# Altium PCB main.PcbDoc (part 1 of 2)
Units mm, origin at the board's own origin, x right, y up, seen from the top; angles counter-clockwise.
Board outline 97 x 82.5 mm, 4 copper layers (Top Layer, +5/3.3, GND, Bottom Layer), stack 1.656 mm thick; 92 components, 74 nets, 382 pads, 341 vias.
Unrouted connection lines stored in the file: 1.
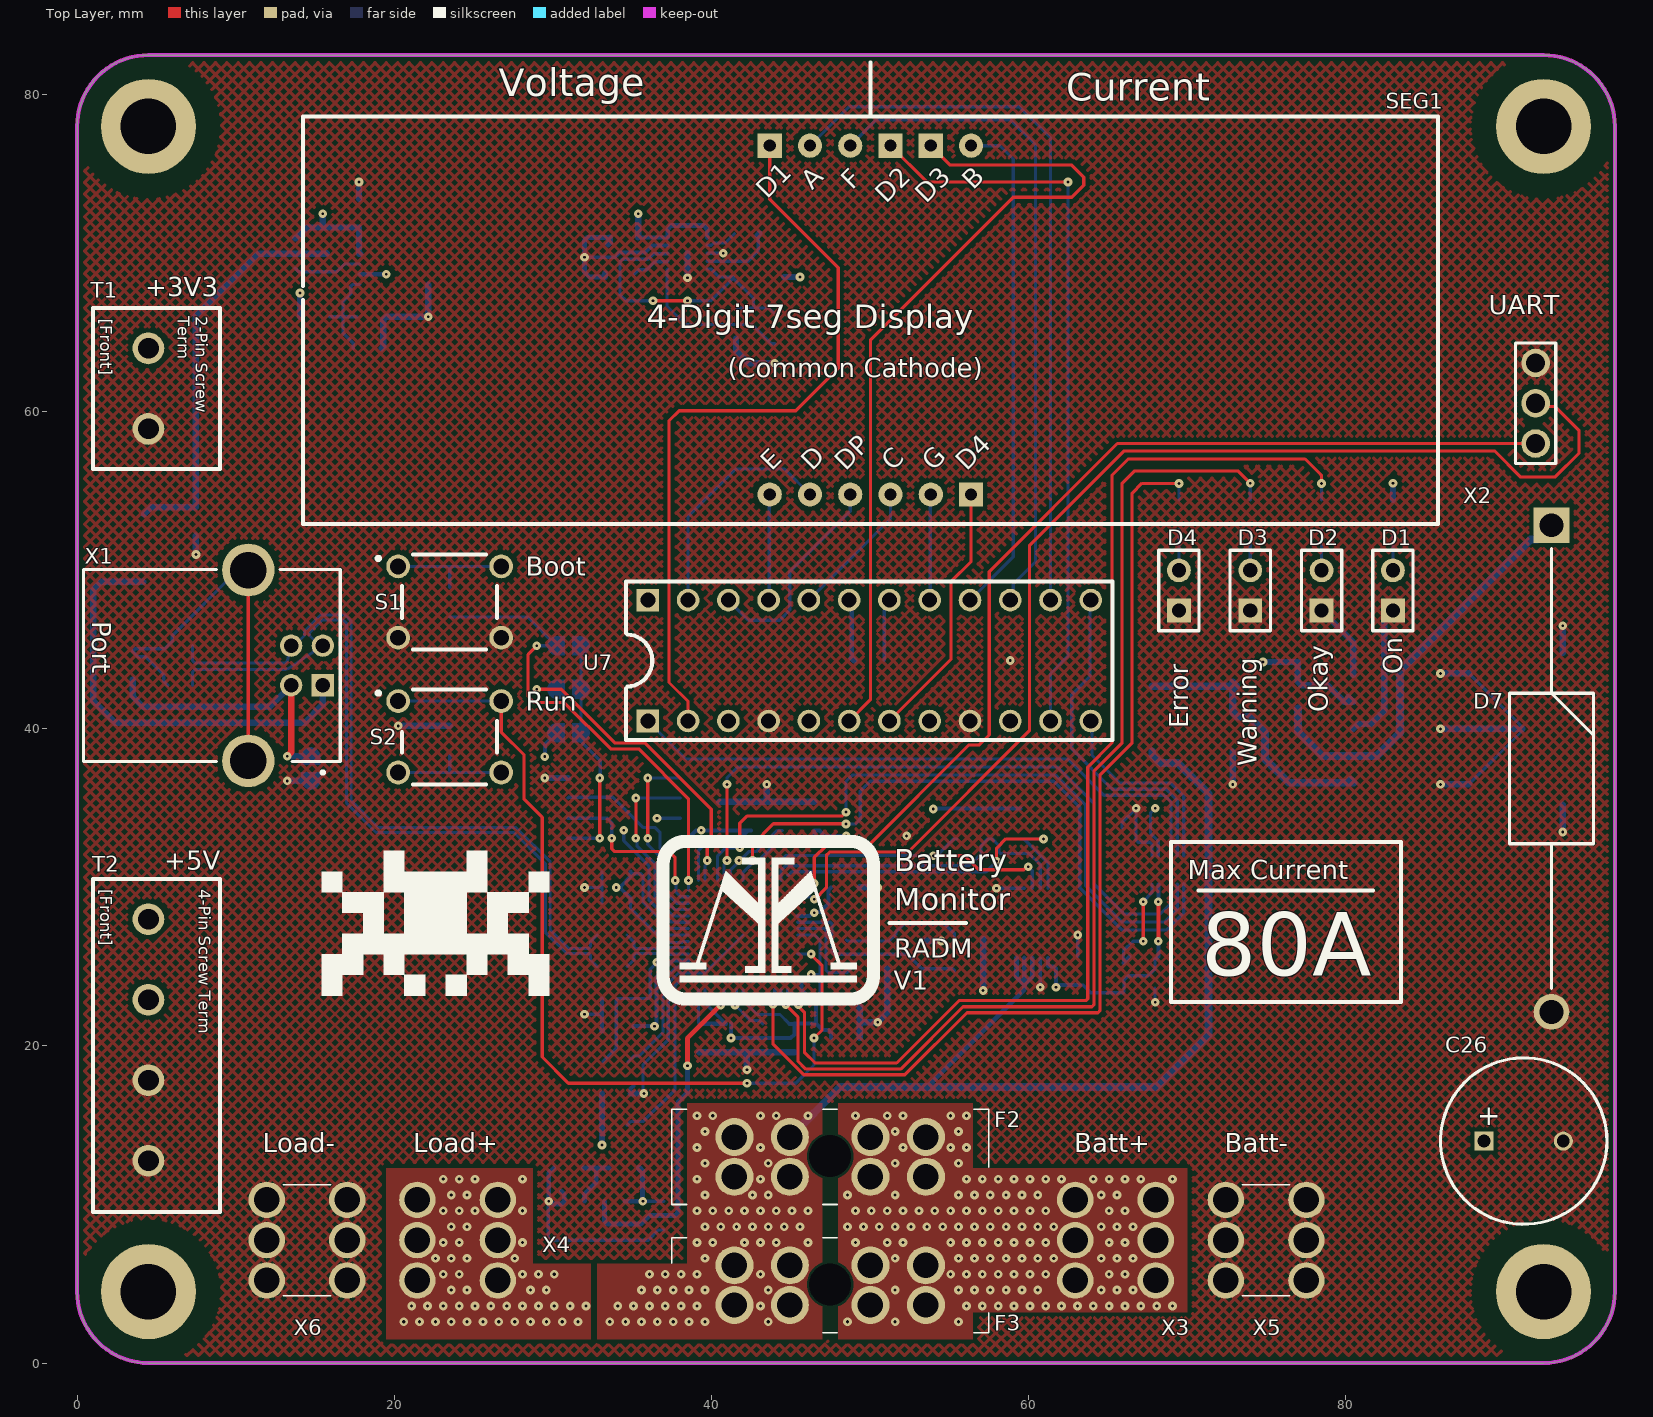
[diagram p0: Top Layer view]
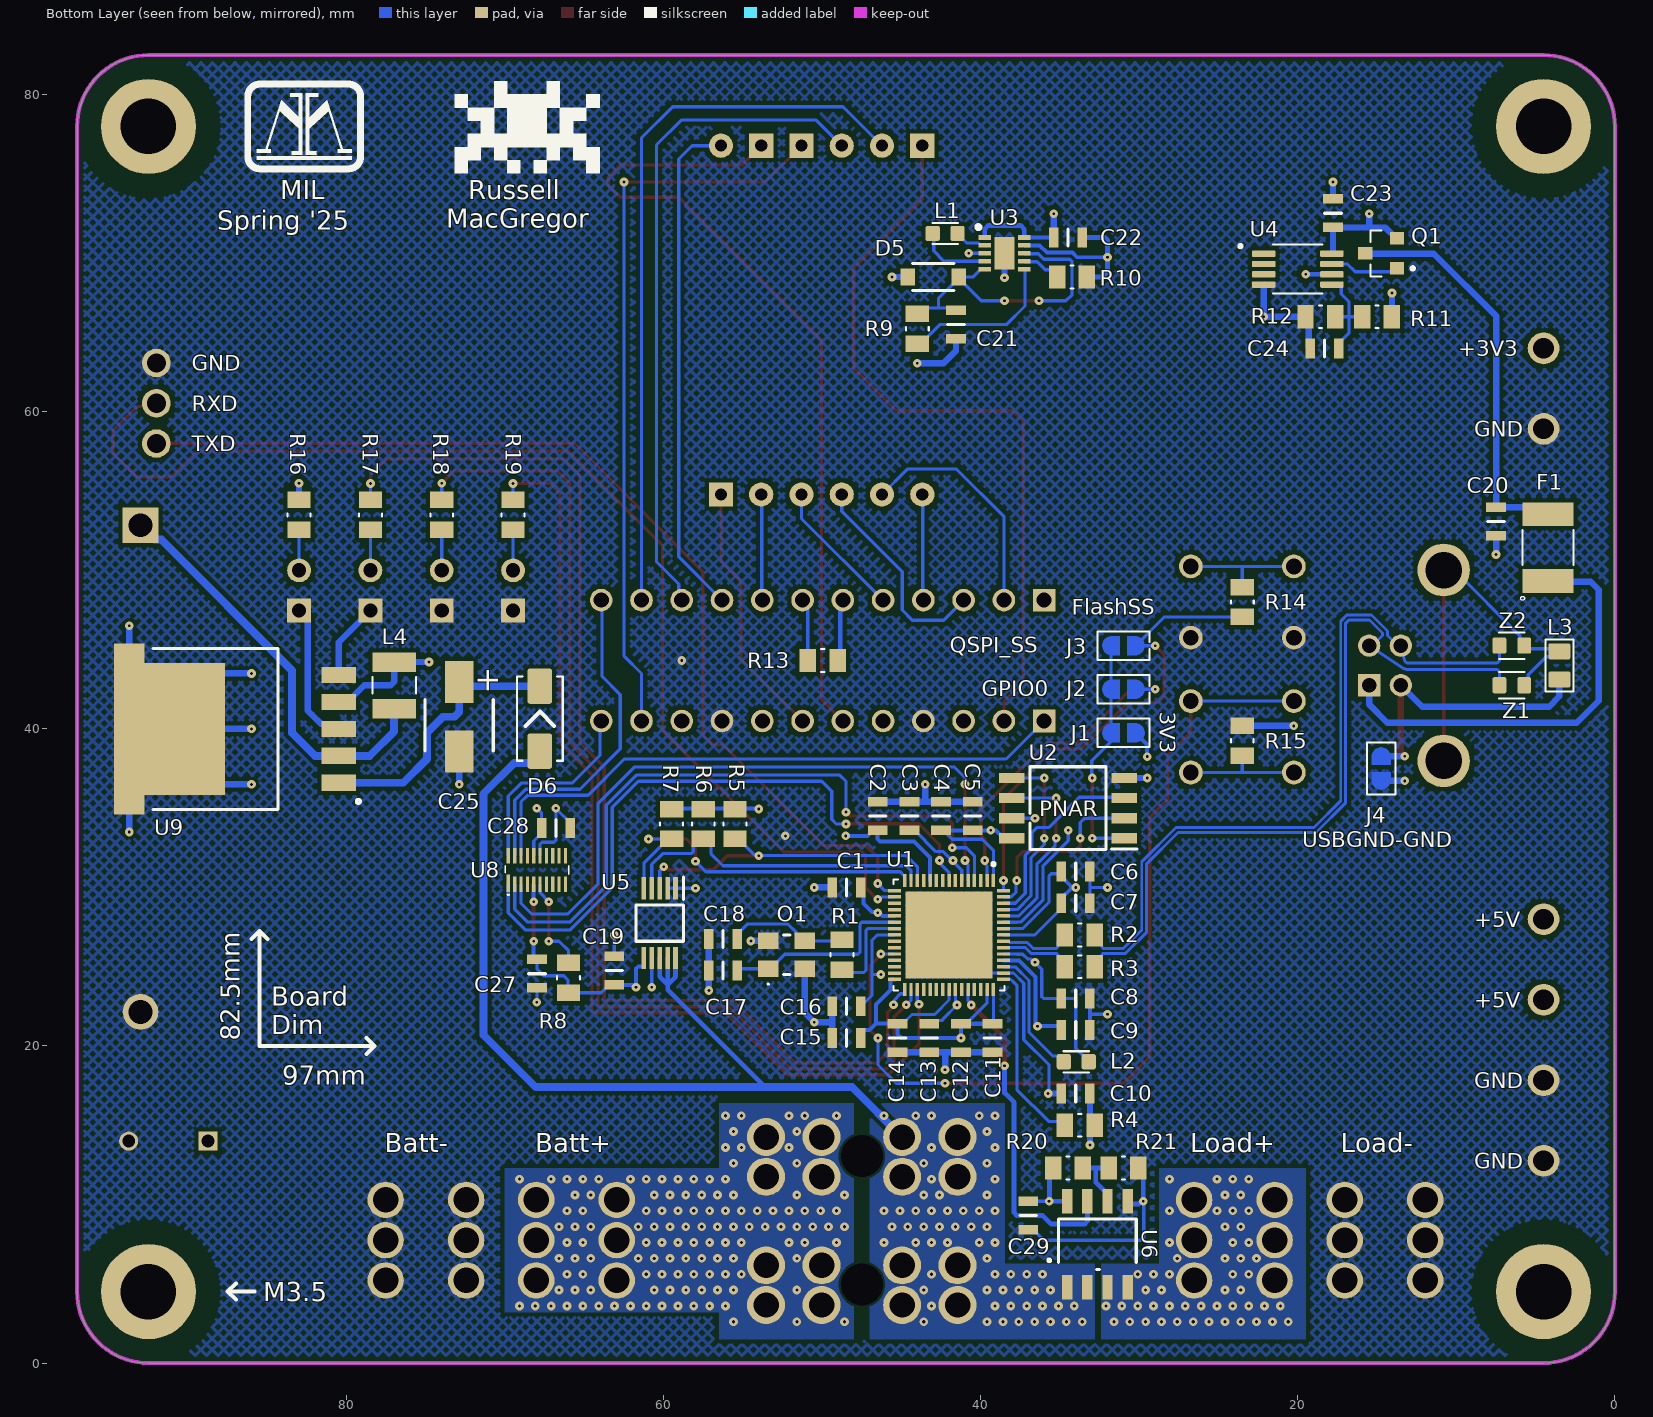
[diagram p1: Bottom Layer view, seen from below]
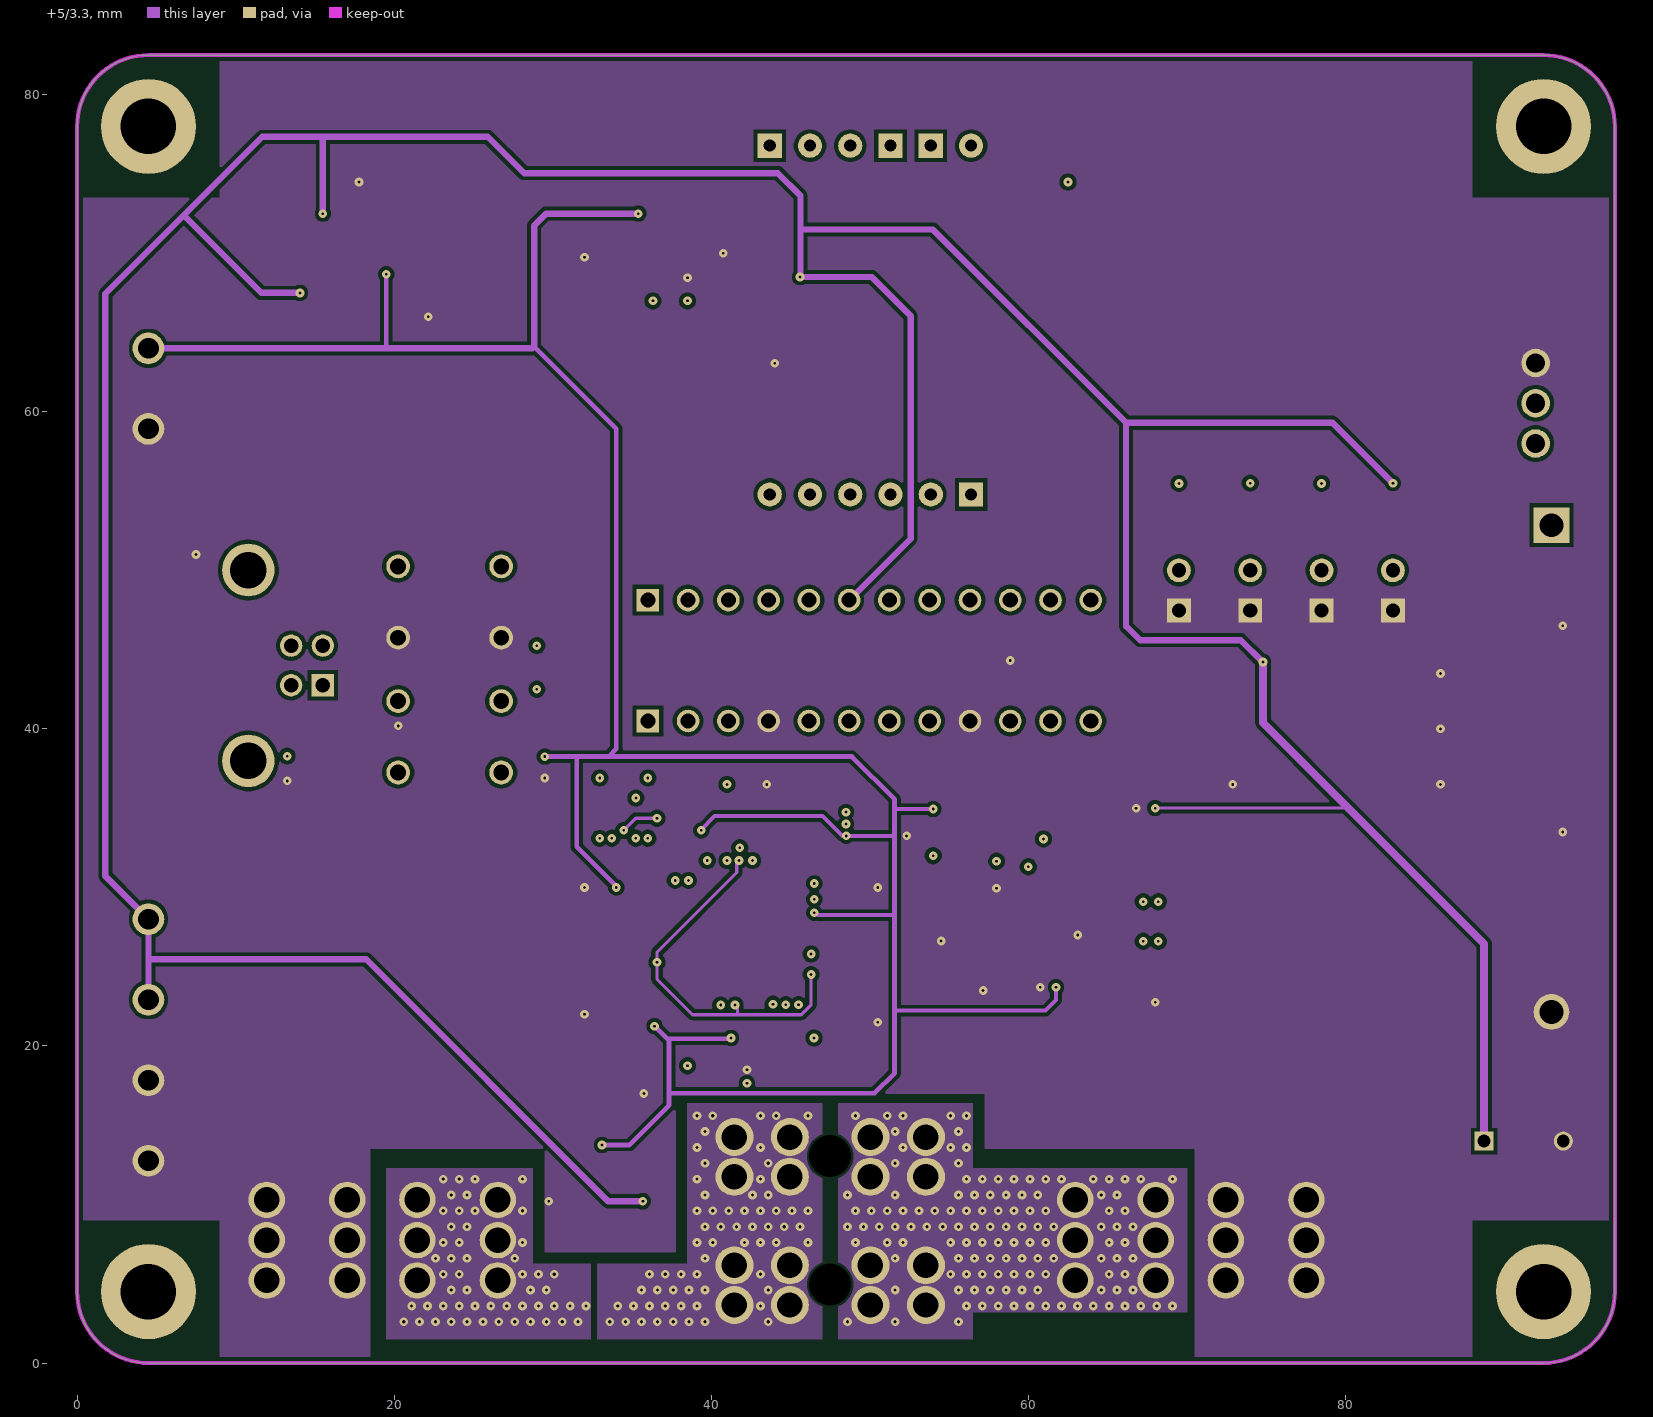
[diagram p2: +5/3.3]
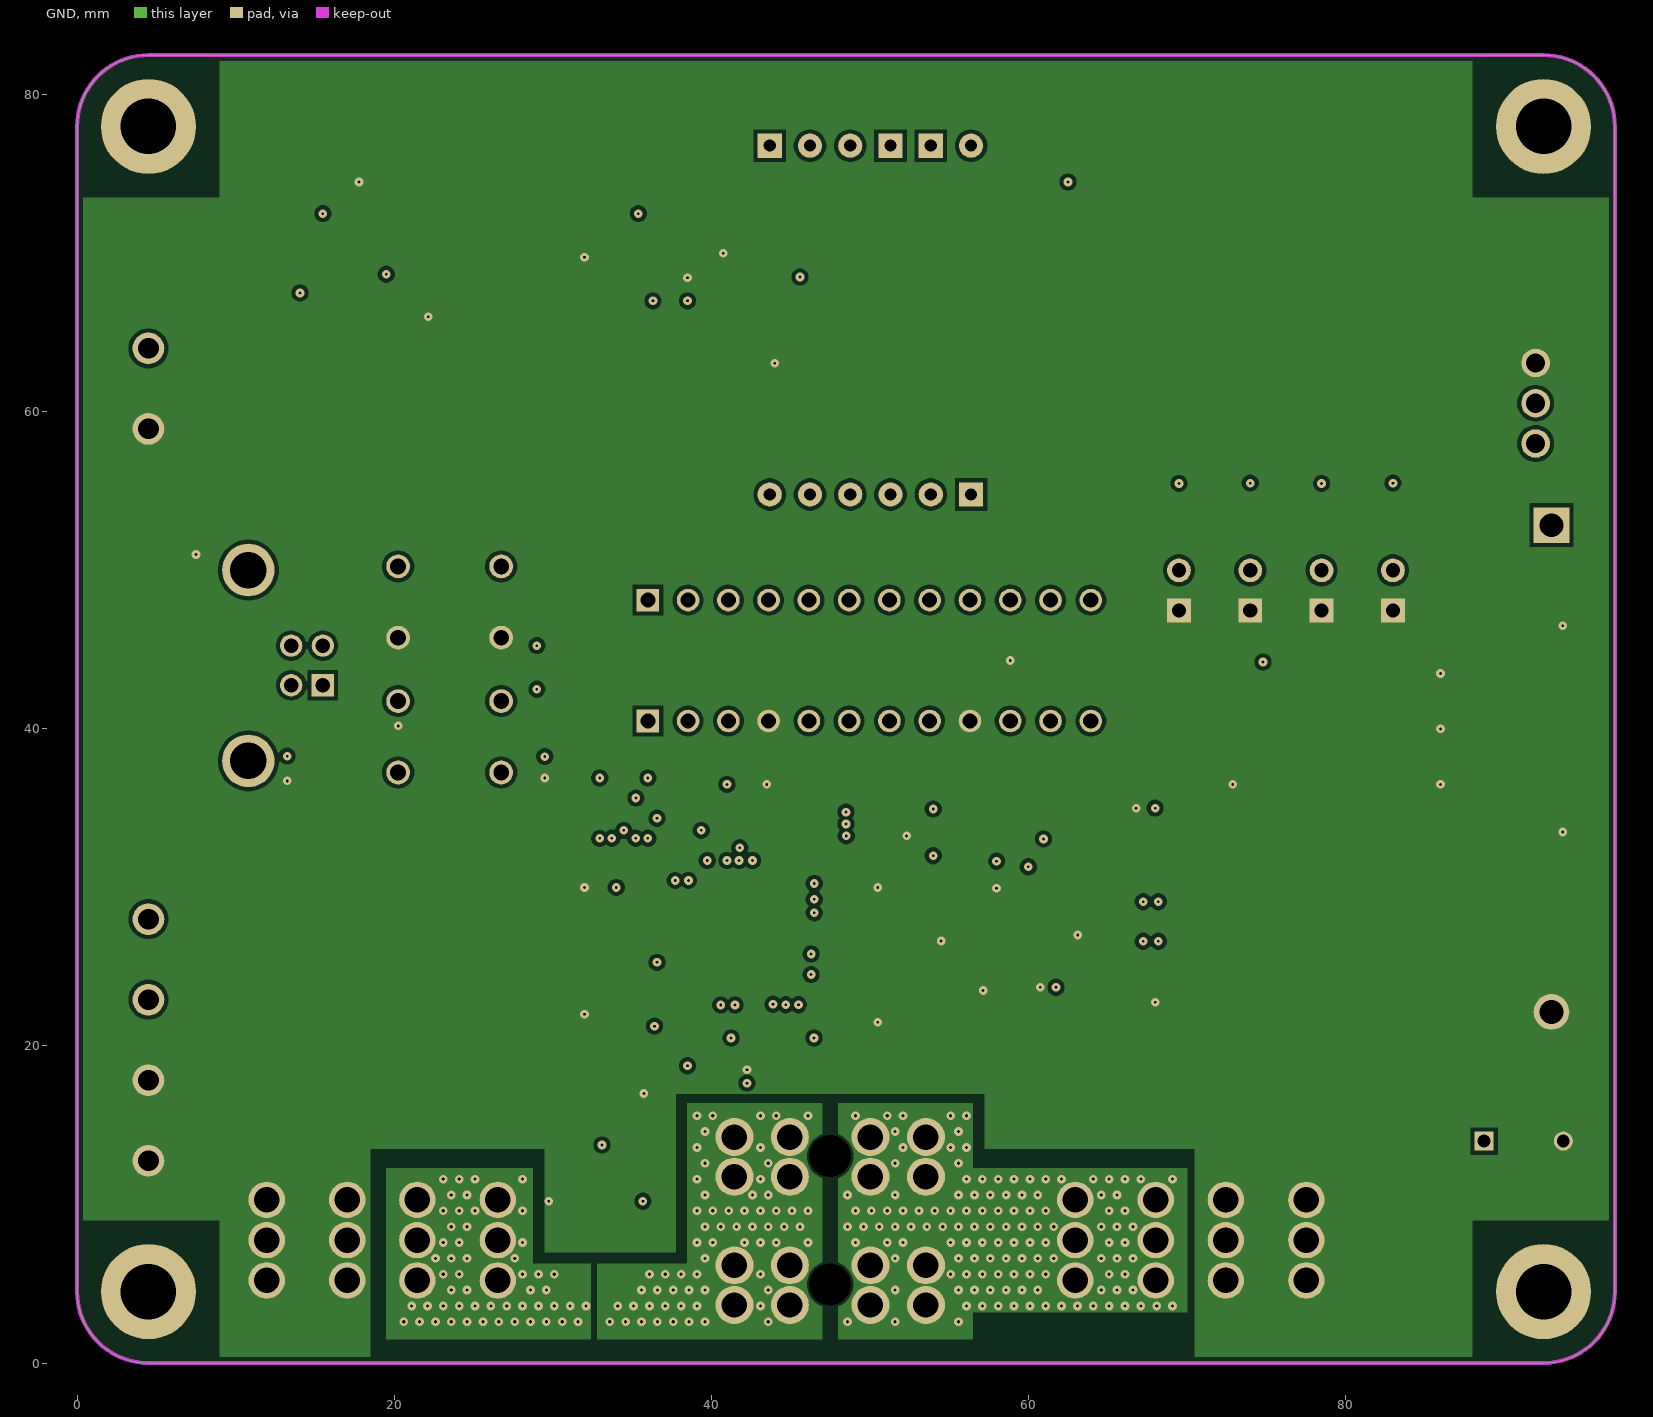
[diagram p3: GND]

## Layer stack, top to bottom
Top Solder: solder mask 0.0102, Solder Resist, Dk 3.8
Top Layer: signal copper 0.07
Dielectric: prepreg 0.2104, 7628*1, Dk 4.4
+5/3.3: signal copper 0.0152
Core: dielectric 1.065, FR-4, Dk 4.6
GND: signal copper 0.0152
Dielectric 3: prepreg 0.2104, 7628*1, Dk 4.4
Bottom Layer: signal copper 0.07
Bottom Solder: solder mask 0.0102, Solder Resist, Dk 3.8

## Board outline
4.5,0 cw(c4.5,4.5) 0,4.5 0,78 cw(c4.5,78) 4.5,82.5 92.5,82.5 cw(c92.5,78) 97,78 97,4.5 cw(c92.5,4.5) 92.5,0

## Design rules (kind name [scope] priority, off if disabled: settings)
BoardOutlineClearance [All] p1: gap=0.2 ignorepadtopadclearanceinfootprint=FALSE
Clearance "Different Nets" [All] p1: gap=0.1 ignorepadtopadclearanceinfootprint=TRUE except(0.15: Arc-Hole Track-Hole SMDPad-Hole THPad-Hole Via-Hole Fill-Hole Poly-Hole Region-Hole Text-Hole; 0.25: Arc-Fill Arc-Poly Arc-Region Track-Fill Track-Poly Track-Region SMDPad-Fill SMDPad-Poly SMDPad-Region THPad-Fill THPad-Poly THPad-Region Via-Fill Via-Poly Via-Region Fill-Fill Fill-Poly Fill-Region Poly-Poly Poly-Region Region-Region)
Clearance "Same Net" [All] p2: gap=0 ignorepadtopadclearanceinfootprint=FALSE except(0.1: THPad-Via)
Clearance "Diff Pairs" [All] p3: gap=0.15 ignorepadtopadclearanceinfootprint=TRUE
ComponentClearance [All] p1: gap=0.102 collisioncheckmode=3 verticalgap=0.102 showdistances=TRUE
DiffPairsRouting [All] p1: maxlimit=0.127 minlimit=0.127 mostfreqgap=0.127 toplayer_minwidth=0.185 toplayer_maxwidth=0.185 toplayer_prefwidth=0.185 midlayer1_minwidth=0.154 midlayer1_maxwidth=0.154 midlayer1_prefwidth=0.154 midlayer2_minwidth=0.154 midlayer2_maxwidth=0.154 midlayer2_prefwidth=0.154 bottomlayer_minwidth=0.185 bottomlayer_maxwidth=0.185 bottomlayer_prefwidth=0.185 impedanceprofiledriven=TRUE impedanceprofileid={A8D17695-7C71-43F6-A524-14699D1E17CB} impedanceprofilevalue=90.000000 maxuncoupledlength=12.7
Height [All] p1: minheight=0 maxheight=1816.048 prefheight=12.7
HoleSize [All] p1: absolutevalues=TRUE maxlimit=6.3 minlimit=0.15 maxpercent=80.000 minpercent=20.000
HoleToHoleClearance [All] p1: gap=0.25 allowstackedmicrovias=FALSE
MinimumAnnularRing [All] p1: minimumring=0.076
MinimumSolderMaskSliver [All] p1: minsoldermaskwidth=0
PlaneClearance [All] p1: clearance=0.4
PlaneConnect PlaneConnectPowerPads [InPadClass('PowerPads')] p1: planeconnectstyle=Direct reliefexpansion=0.508 reliefentries=4 reliefconductorwidth=0.254 reliefairgap=0.254
PlaneConnect PlaneConnectTopLayer [OnLayer('Top Layer')] p2: pad.planeconnectstyle=Relief pad.reliefexpansion=0.3 pad.reliefentries=4 pad.reliefconductorwidth=0.203 pad.reliefairgap=0.203 via.planeconnectstyle=Direct via.reliefexpansion=0.3 via.reliefentries=4 via.reliefconductorwidth=0.127 via.reliefairgap=0.127
PlaneConnect PlaneConnectBottomLayer [OnLayer('Bottom Layer')] p3: pad.planeconnectstyle=Relief pad.reliefexpansion=0.3 pad.reliefentries=4 pad.reliefconductorwidth=0.203 pad.reliefairgap=0.203 via.planeconnectstyle=Direct via.reliefexpansion=0.3 via.reliefentries=4 via.reliefconductorwidth=0.127 via.reliefairgap=0.127
PlaneConnect PlaneConnectMidLayer1 [OnLayer('Mid Layer 1')] p4: pad.planeconnectstyle=Relief pad.reliefexpansion=0.3 pad.reliefentries=4 pad.reliefconductorwidth=0.102 pad.reliefairgap=0.102 via.planeconnectstyle=Direct via.reliefexpansion=0.3 via.reliefentries=4 via.reliefconductorwidth=0.127 via.reliefairgap=0.127
PlaneConnect PlaneConnectMidLayer2 [OnLayer('Mid Layer 2')] p5: pad.planeconnectstyle=Relief pad.reliefexpansion=0.3 pad.reliefentries=4 pad.reliefconductorwidth=0.102 pad.reliefairgap=0.102 via.planeconnectstyle=Direct via.reliefexpansion=0.3 via.reliefentries=4 via.reliefconductorwidth=0.127 via.reliefairgap=0.127
PolygonConnect "High Current" [InNet('NetF2_2') OR InNet('Battery+') OR InNet('Load+') OR InNet('GND')] p1: connectstyle=Direct reliefconductorwidth=0.254 reliefentries=4 polygonreliefangle="90 Angle" airgapwidth=0.254
PolygonConnect General [All] p2: connectstyle=Relief reliefconductorwidth=0.254 reliefentries=4 polygonreliefangle="90 Angle" airgapwidth=0.254
RoutingVias [All] p1: holewidth=0.175 width=0.55 viastyle="Through Hole" minholewidth=0.15 minwidth=0.25 maxholewidth=6.3 maxwidth=6.55
SilkToSilkClearance [All] p1: silktosilkclearance=0
SilkToSolderMaskClearance [All] p1: minsilkscreentomaskgap=0 clearancetoexposedcopper=TRUE
SolderMaskExpansion [All] p1: expansion=0.075 istentingtop=FALSE
SupplyNets "Schematic Supply Nets_30" [InNet('MOSI1')] p1: voltage=0.000
SupplyNets "Schematic Supply Nets_29" [InNet('D_LOAD (C\S\\) 5V')] p2: voltage=0.000
SupplyNets "Schematic Supply Nets_28" [InNet('SCK1 5V')] p3: voltage=0.000
SupplyNets "Schematic Supply Nets_27" [InNet('D_LOAD (C\S\\)')] p4: voltage=0.000
SupplyNets "Schematic Supply Nets_26" [InNet('MOSI1 5V')] p5: voltage=0.000
SupplyNets "Schematic Supply Nets_12" [InNet('SCK1')] p6: voltage=0.000
SupplyNets "Schematic Supply Nets_25" [InNet('VREG_PGND')] p7: voltage=0.000
SupplyNets "Schematic Supply Nets_24" [InNet('SDA')] p8: voltage=0.000
SupplyNets "Schematic Supply Nets_23" [InNet('Load+')] p9: voltage=0.000
SupplyNets "Schematic Supply Nets_22" [InNet('Battery+')] p10: voltage=0.000
SupplyNets "Schematic Supply Nets_21" [InNet('SCL')] p11: voltage=0.000
SupplyNets "Schematic Supply Nets_20" [InNet('Current Sense')] p12: voltage=0.000
SupplyNets "Schematic Supply Nets_19" [InNet('Voltage_Alert')] p13: voltage=0.000
SupplyNets "Schematic Supply Nets_18" [InNet('DX_P')] p14: voltage=0.000
SupplyNets "Schematic Supply Nets_17" [InNet('LM2576_FEEDBACK')] p15: voltage=0.000
SupplyNets "Schematic Supply Nets_16" [InNet('+3V3')] p16: voltage=0.000
SupplyNets "Schematic Supply Nets_15" [InNet('DX_N')] p17: voltage=0.000
SupplyNets "Schematic Supply Nets_14" [InNet('+1V1')] p18: voltage=0.000
SupplyNets "Schematic Supply Nets_13" [InNet('GPIO0')] p19: voltage=0.000
SupplyNets "Schematic Supply Nets_11" [InNet('XIN')] p20: voltage=0.000
SupplyNets "Schematic Supply Nets_10" [InNet('VREG_AVDD')] p21: voltage=0.000
SupplyNets "Schematic Supply Nets_9" [InNet('QSPI_SD3')] p22: voltage=0.000
SupplyNets "Schematic Supply Nets_8" [InNet('QSPI_SD0')] p23: voltage=0.000
SupplyNets "Schematic Supply Nets_7" [InNet('Flash SS')] p24: voltage=0.000
SupplyNets "Schematic Supply Nets_6" [InNet('QSPI_SS')] p25: voltage=0.000
SupplyNets "Schematic Supply Nets_5" [InNet('VREG_LX')] p26: voltage=0.000
SupplyNets "Schematic Supply Nets_4" [InNet('XOUT')] p27: voltage=0.000
SupplyNets "Schematic Supply Nets_3" [InNet('RUN')] p28: voltage=0.000
SupplyNets "Schematic Supply Nets_2" [InNet('QSPI_SCLK')] p29: voltage=0.000
SupplyNets "Schematic Supply Nets_1" [InNet('QSPI_SD1')] p30: voltage=0.000
SupplyNets "Schematic Supply Nets" [InNet('QSPI_SD2')] p31: voltage=0.000
Width [All] p1: maxlimit=1500 minlimit=0.2 preferedwidth=0.3
20 further rules are at their usual default settings.

## Classes and differential pairs
component class "Seven-Seg Displays": C27 C28 R8 R13 SEG1 U7 U8
component class "Primary MCU": C1 C2 C3 C4 C5 C6 C7 C8 C9 C10 C11 C12 C13 C14 C15 C16 C17 C18 C20 C21 C22 C23 C24 D1 D2 D3 D4 D5 F1 J1 J2 J3 J4 L1 L2 L3 O1 Q1 R1 R2 R3 R4 R6 R7 R9 R10 R11 R12 R14 R15 R16 R17 R18 R19 S1 S2 U1 U2 U3 U4 X1 X2 Z1 Z2
component class "DC Step-Down Converter": C25 C26 D6 D7 D9 L4 P4 P5 T1 T2 U9
component class "Battery Monitoring": C19 C29 F2 F3 R5 R20 R21 U5 U6 X3 X4 X5 X6
differential pair DX: +DX_P -DX_N
differential pair D: +D_P -D_N

## Components (designator, comment, footprint, x,y, rotation, side; value= is the part's Value field where it differs from the comment)
C1 "[Cap] SMD Nonpolarized" "[Cap] SMD 0805" 48.465,30 r180 bottom
C2 "[Cap] SMD Nonpolarized" "[Cap] SMD 0805" 46.5,34.5 r270 bottom
C3 "[Cap] SMD Nonpolarized" "[Cap] SMD 0805" 44.5,34.5 r270 bottom
C4 "[Cap] SMD Nonpolarized" "[Cap] SMD 0805" 42.5,34.5 r270 bottom
C5 "[Cap] SMD Nonpolarized" "[Cap] SMD 0805" 40.5,34.5 r270 bottom
C6 "[Cap] SMD Nonpolarized" "[Cap] SMD 0805" 34.01,31 r0 bottom
C7 "[Cap] SMD Nonpolarized" "[Cap] SMD 0805" 34.01,29 r0 bottom
C8 "[Cap] SMD Nonpolarized" "[Cap] SMD 0805" 34.01,23 r0 bottom
C9 "[Cap] SMD Nonpolarized" "[Cap] SMD 0805" 34.01,21 r0 bottom
C10 "[Cap] SMD Nonpolarized" "[Cap] SMD 0805" 34.01,17 r180 bottom
C11 "[Cap] SMD Nonpolarized" "[Cap] SMD 0805" 39.25,20.5 r270 bottom
C12 "[Cap] SMD Nonpolarized" "[Cap] SMD 0805" 41.25,20.5 r90 bottom
C13 "[Cap] SMD Nonpolarized" "[Cap] SMD 0805" 43.25,20.5 r90 bottom
C14 "[Cap] SMD Nonpolarized" "[Cap] SMD 0805" 45.25,20.5 r90 bottom
C15 "[Cap] SMD Nonpolarized" "[Cap] SMD 0805" 48.465,20.5 r180 bottom
C16 "[Cap] SMD Nonpolarized" "[Cap] SMD 0805" 48.465,22.5 r180 bottom
C17 "[Cap] SMD Nonpolarized" "[Cap] SMD 0805" 56.25,24.75 r180 bottom
C18 "[Cap] SMD Nonpolarized" "[Cap] SMD 0805" 56.25,26.75 r180 bottom
C19 "[Cap] SMD Nonpolarized" "[Cap] SMD 0805" 63.119,24.75 r90 bottom
C20 "[Cap] SMD Nonpolarized" "[Cap] SMD 0805" 7.493,53.085 r270 bottom
C21 "[Cap] SMD Nonpolarized" "[Cap] SMD 0805" 41.565,65.5 r90 bottom
C22 "[Cap] SMD Nonpolarized" "[Cap] SMD 0805" 34.5,71 r0 bottom
C23 "[Cap] SMD Nonpolarized" "[Cap] SMD 0805" 17.78,72.528 r270 bottom
C24 "[Cap] SMD Nonpolarized" "[Cap] SMD 0805" 18.315,64 r180 bottom
C25 "SMD Polarized" "[Cap] SMD Polarized, 4mm" 72.897,40.767 r270 bottom
C26 "Thru-Hole Polarized" "[Cap] Thru-Hole Polarized 5mm" 91.25,14 r0 top
C27 "[Cap] SMD Nonpolarized" "[Cap] SMD 0805" 68,24.559 r270 bottom
C28 "[Cap] SMD Nonpolarized" "[Cap] SMD 0805" 66.8,33.75 r180 bottom
C29 "[Cap] SMD Nonpolarized" "[Cap] SMD 0805" 37,9.3 r90 bottom
D1 "LED" "[LED] Thru-Hole, 3mm, White" 83,50 r270 top
D2 "LED" "[LED] Thru-Hole, 3mm, Green" 78.5,50 r270 top
D3 "LED" "[LED] Thru-Hole, 3mm, Yellow" 74,50 r270 top
D4 "LED" "[LED] Thru-Hole, 3mm, Red" 69.5,50 r270 top
D5 "Schottky" "[Diode] SMD SOD-123W" 43,68.5 r180 bottom
D6 "Rectifier" "[Diode] SMD M7" 67.817,40.64 r90 bottom
D7 "1N5822" "[Diode] Thru-Hole Schottky" 93,37.5 r270 top
F1 "PTC" "[PTC] 500mA Trip" 4.223,51.435 r90 bottom
F2 "Thru-Hole" "[Fuse] Blade (2)" 47.5,13 r0 top
F3 "Thru-Hole" "[Fuse] Blade (2)" 47.5,4.91 r0 top
J1 "[Jump] SMD Jumper" "[Jumper] Solderable Jumper" 31,39.75 r0 bottom
J2 "[Jump] SMD Jumper" "[Jumper] Solderable Jumper" 31,42.5 r0 bottom
J3 "[Jump] SMD Jumper" "[Jumper] Solderable Jumper" 31,45.25 r0 bottom
J4 "[Jump] SMD Jumper" "[Jumper] Solderable Jumper" 14.75,37.5 r90 bottom
L1 "SMD Inductor" "[Inductor] SMD 0603" 42.25,71.25 r180 bottom
L2 "SMD Inductor" "[Inductor] SMD 0603" 33.975,19 r0 bottom
L3 "652-MH2029-300Y" "[Ferrite] SMD Bead 0805 (1)" 3.5,44 r270 bottom
L4 "SMD Inductor" "[Inductor] SMD 1210" 77,42.75 r90 bottom
O1 "12MHz" "[XTAL] SMD 12MHz" 52.25,25.75 r180 bottom
Q1 "PMV48XP" "[FET] P-Channel Mosfet" 14.75,70 r0 bottom
R1 "[Res] SMD Resistor" "[Res] SMD 0805" 48.75,25.75 r90 bottom
R2 "[Res] SMD Resistor" "[Res] SMD 0805" 33.75,27 r180 bottom
R3 "[Res] SMD Resistor" "[Res] SMD 0805" 33.75,25 r180 bottom
R4 "[Res] SMD Resistor" "[Res] SMD 0805" 33.75,15 r180 bottom
R5 "[Res] SMD Resistor" "[Res] SMD 0805" 55.5,34 r90 bottom
R6 "[Res] SMD Resistor" "[Res] SMD 0805" 57.5,34 r90 bottom
R7 "[Res] SMD Resistor" "[Res] SMD 0805" 59.5,34 r90 bottom
R8 "[Res] SMD Resistor" "[Res] SMD 0805" 66,24.299 r90 bottom
R9 "[Res] SMD Resistor" "[Res] SMD 0805" 44,65.24 r90 bottom
R10 "[Res] SMD Resistor" "[Res] SMD 0805" 34.24,68.5 r0 bottom
R11 "[Res] SMD Resistor" "[Res] SMD 0805" 15,66 r180 bottom
R12 "[Res] SMD Resistor" "[Res] SMD 0805" 18.575,66 r180 bottom
R13 "[Res] SMD Resistor" "[Res] SMD 0805" 49.97,44.31 r0 bottom
R14 "[Res] SMD Resistor" "[Res] SMD 0805" 23.5,48 r270 bottom
R15 "[Res] SMD Resistor" "[Res] SMD 0805" 23.5,39.25 r90 bottom
R16 "[Res] SMD Resistor" "[Res] SMD 0805" 83,53.5 r270 bottom
R17 "[Res] SMD Resistor" "[Res] SMD 0805" 78.5,53.5 r270 bottom
R18 "[Res] SMD Resistor" "[Res] SMD 0805" 74,53.5 r270 bottom
R19 "[Res] SMD Resistor" "[Res] SMD 0805" 69.5,53.5 r270 bottom
R20 "[Res] SMD Resistor" "[Res] SMD 0805" 34.5,12.3 r0 bottom
R21 "[Res] SMD Resistor" "[Res] SMD 0805" 31,12.3 r0 bottom
S1 "Standard pushbutton" "[Switch] Pushbutton" 23.5,48 r0 top
S2 "Standard pushbutton" "[Switch] Pushbutton" 23.5,39.5 r0 top
SEG1 "[7seg] 4-Digit" "[7seg] 4-Digit" 50.038,65.786 r0 top
T1 "[Screw Terminal] 2pin" "[Screw Terminal] 2pin" 4.5,64 r270 top
T2 "4pin Screw Terminal" "[Screw Terminal] 4pin" 4.5,28 r270 top
U1 "[MCU] RP2350A" "[MCU] RP2350A" 42,27 r270 bottom
U2 "W25Q128JVS" "[IC] 16Mb Flash Memory" 34.5,35 r0 bottom
U3 "RT6150B-33GQW" "[IC] 3V3 Regulator (2)" 38.5,70 r180 bottom
U4 "LMV358IDGKR" "[IC] Dual Op-Ap" 20,69 r180 bottom
U5 "INA226" "[IC] Battery Voltage Monitor (36V)" 60.25,27.75 r270 bottom
U6 "TMCS1100A3QDR" "[IC] Hall Effect Current Sensor" 32.639,7.493 r90 bottom
U7 "MAX7219" "[DIP IC] 24pin, Socket" 36,40.5 r90 top
U8 "TXB0108DQSR" "[IC] Level Shifter" 68,31 r180 bottom
U9 "LM2576" "[IC] Buck Converter" 86.5,40 r180 bottom
X1 "[Port] USB Type-B Female (Thru-Hole)" "[Port] USB Type-B Thru-Hole" 8.5,44 r270 top
X2 "[JST] Female 3 Pin" "[JST] 3PIN" 92,58 r90 top
X3 "7461057" "[Port] Shank Connector (100A)" 65.5,7.75 r0 top
X4 "7461057" "[Port] Shank Connector (100A)" 24,7.75 r0 top
X5 "7461057" "[Port] Shank Connector (100A)" 75,7.75 r0 top
X6 "7461057" "[Port] Shank Connector (100A)" 14.5,7.75 r0 top
Z1 "[Inductor] SMD Varistor" "[Inductor] SMD Varistor 0603" 6.5,45.25 r0 bottom
Z2 "[Inductor] SMD Varistor" "[Inductor] SMD Varistor 0603" 6.5,42.75 r0 bottom

## Footprints (in the part's own frame and the unit in brackets; to place one, negate y for a bottom-side part, rotate by r counter-clockwise, add the part's x,y. Pads: shape width x height; smd on the part's side, far side on the other; paste and mask are expansions set on the pad)
"[7seg] 4-Digit" [mil]
  round 60 hole 30: 1(-250,-433.07) 2(-150,-433.07) 3(-50,-433.07) 4(50,-433.07) 5(150,-433.07) 7(250,433.07) 10(-50,433.07) 11(-150,433.07)
  rect 60x60 hole 30: 6(250,-433.07) 8(150,433.07) 9(50,433.07) 12(-250,433.07)
  silkscreen extent -1409,-506 1409,506, body extent -1415,-510 1415,510, height 354
"[Cap] SMD 0805" [mm]
  rect 0.6x1.25 smd: 1(-0.9,0) 2(0.9,0)
  silkscreen extent 0,-0.53 0,0.53, body extent -1,-0.63 1,0.63, height 1
"[Cap] SMD Polarized, 4mm" [mm]
  rect 2.65x1.8 smd: 1(-2.2,0) 2(2.2,0)
  silkscreen extent -1.07,-2.15 2.15,2.15, body extent -2.6,-2.25 2.6,2.25, height 5.66
"[Cap] Thru-Hole Polarized 5mm" [mm] "5mm"
  rect 1.2x1.2 hole 0.8: 1(-2.5,0)
  round 1.2 hole 0.8: 2(2.5,0)
  silkscreen extent -5.25,-5.25 5.25,5.25, body extent -5.25,-5.24 5.25,5.24, height 22
"[Diode] SMD M7" [mm]
  rrect15% 2.21x1.53 smd: 1(2.05,0) 2(-2.05,0)
  silkscreen extent -2.65,-1.45 2.65,1.45, body extent -2.53,-1.35 2.52,1.35, height 2.37
"[Diode] SMD SOD-123W" [mm] "SMD SOD-123W"
  rect 0.92x1.08 smd: 1(1.6,0) 2(-1.6,0)
  silkscreen extent -1.3,-0.85 1.3,0.85, body extent -1.75,-1 1.75,1, height 1.07
"[Diode] Thru-Hole Schottky" [mm] "1N5822"
  rect 2.25x2.25 hole 1.5: 1(-15.35,0)
  round 2.25 hole 1.5: 2(15.35,0)
  silkscreen extent -13.87,-2.65 13.88,2.65, body extent -16,-2.65 16,2.65, height 5.29
"[DIP IC] 24pin, Socket" [mm]
  rect 1.425x1.425 hole 0.95: 1(0,0) 24(7.62,0)
  round 1.425 hole 0.95: 2(0,-2.54) 3(0,-5.08) 4(0,-7.62) 5(0,-10.16) 6(0,-12.7) 7(0,-15.24) 8(0,-17.78) 9(0,-20.32) 10(0,-22.86) 11(0,-25.4) 12(0,-27.94) 13(7.62,-27.94) 14(7.62,-25.4) 15(7.62,-22.86) 16(7.62,-20.32) 17(7.62,-17.78) 18(7.62,-15.24) 19(7.62,-12.7) 20(7.62,-10.16) 21(7.62,-7.62) 22(7.62,-5.08) 23(7.62,-2.54)
  silkscreen extent -1.19,-29.31 8.81,1.37, body extent -1.19,-29.59 8.81,1.65, height 5.02
"[Ferrite] SMD Bead 0805 (1)" [mil]
  rrect25% 40x55 smd: 1(-35,0) 2(35,0)
  silkscreen extent -65,-35 65,35, body extent -39,-24 39,24, height 43
"[FET] P-Channel Mosfet" [mm] "PMV48XP"
  rect 0.9x0.8 smd: 1(-1,0.95) 2(-1,-0.95) 3(1,0)
  silkscreen extent -2.1,-1.45 0.65,1.45, body extent -1.15,-1.45 1.15,1.45, height 1.1
"[Fuse] Blade (2)" [mm]
  round 2.4 hole 1.6: 1(-6.04,-1.25) 1(-6.04,1.25) 1(-2.54,-1.25) 1(-2.54,1.25) 2(2.54,-1.25) 2(2.54,1.25) 2(6.04,-1.25) 2(6.04,1.25)
  round 1.325 hole 2.65 unplated: ""(0,0.045)
  silkscreen extent -10,-3 10,3, body extent -10,-3 10,3, height 18.03
"[IC] 3V3 Regulator (2)" [mm] "RT6150B-33GQW"
  rect 0.8x0.3 smd: 1(-1.25,1) 2(-1.25,0.5) 3(-1.25,0) 4(-1.25,-0.5) 5(-1.25,-1) 6(1.25,-1) 7(1.25,-0.5) 8(1.25,0) 9(1.25,0.5) 10(1.25,1)
  rect 1.25x2.05 smd: 11(0,0)
  silkscreen extent -1.78,1.53 -1.53,1.77, body extent -1.3,-1.25 1.3,1.25, height 0.8
"[IC] 16Mb Flash Memory" [mm] "W25Q128JVSIQ TR"
  rect 1.6x0.65 smd: 1(-3.55,1.905) 2(-3.55,0.635) 3(-3.55,-0.635) 4(-3.55,-1.905) 5(3.55,-1.905) 6(3.55,-0.635) 7(3.55,0.635) 8(3.55,1.905)
  silkscreen extent -4.35,-2.61 2.4,2.62, body extent -3.9,-2.61 3.9,2.62, height 1.95
"[IC] Battery Voltage Monitor (36V)" [mm] "INA226AIDGST"
  rect 1.4x0.3 smd: 1(-2.2,1) 2(-2.2,0.5) 3(-2.2,0) 4(-2.2,-0.5) 5(-2.2,-1) 6(2.2,-1) 7(2.2,-0.5) 8(2.2,0) 9(2.2,0.5) 10(2.2,1)
  silkscreen extent -2.9,-1.5 1.15,1.5, body extent -2.46,-1.5 2.46,1.5, height 1.1
"[IC] Buck Converter" [mm] "LM2576"
  rect 2.16x1.02 smd: 1(6,-3.4) 2(6,-1.7) 3(6,0) 4(6,1.7) 5(6,3.4)
  rect 1.91x1.235 smd: 6(-7.215,-4.782) 6(-7.215,4.782)
  rect 6.99x8.33 smd: 6(-4.675,0)
  silkscreen extent -5.71,-5.08 7.36,5.08, body extent -7.57,-5.08 6.78,5.08, height 4.72
"[IC] Dual Op-Ap" [mm] "LMV358IDGKR"
  rrect25% 1.47x0.4 smd: 1(-2.15,0.975) 2(-2.15,0.325) 3(-2.15,-0.325) 4(-2.15,-0.975) 5(2.15,-0.975) 6(2.15,-0.325) 7(2.15,0.325) 8(2.15,0.975)
  silkscreen extent -3.72,-1.55 1.55,1.55, body extent -2.45,-1.5 2.45,1.5, height 1.1
"[IC] Hall Effect Current Sensor" [mm] "TMCS1100"
  rect 1.528x0.65 smd: 1(-2.711,1.905) 2(-2.711,0.635) 3(-2.711,-0.635) 4(-2.711,-1.905) 5(2.711,-1.905) 6(2.711,-0.635) 7(2.711,0.635) 8(2.711,1.905)
  silkscreen extent -1.6,-2.45 1.6,2.45, body extent -3.01,-2.45 3.01,2.45, height 1.63
"[IC] Level Shifter" [mm] "TXB0108DQSR"
  rect 0.2x1.1 smd: 1(-1.8,-0.75)
  rect 0.2x1 smd: 2(-1.4,-0.8) 3(-1,-0.8) 4(-0.6,-0.8) 5(-0.2,-0.8) 6(0.2,-0.8) 7(0.6,-0.8) 8(1,-0.8) 9(1.4,-0.8) 10(1.8,-0.8) 11(1.8,1) 12(1.4,1) 13(1,1) 14(0.6,1) 15(0.2,1) 16(-0.2,1) 17(-0.6,1) 18(-1,1) 19(-1.4,1) 20(-1.8,1)
  silkscreen extent -2,-1.5 2,0.38, body extent -2,-0.9 2,1.1, height 0.55
"[Inductor] SMD 0603" [mm]
  rrect30% 0.9x0.97 smd: 1(-0.785,0) 2(0.785,0)
  silkscreen extent -0.8,-0.66 0.8,0.66, body extent -0.8,-0.4 0.8,0.4, height 0.95
"[Inductor] SMD 1210" [mm]
  rect 1.23x2.76 smd: 1(-1.466,0) 2(1.466,0)
  silkscreen extent -0.53,-1.38 0.53,1.38, body extent -1.6,-1.25 1.6,1.25, height 0.6
"[Inductor] SMD Varistor 0603" [mm] "CG0603MLC-05E"
  rrect25% 0.87x1.02 smd: 1(-0.78,0) 2(0.78,0)
  silkscreen extent -0.8,-0.83 0.8,0.83, body extent -0.8,-0.4 0.8,0.4, height 0.53
"[JST] 3PIN" [mm]
  round 1.8 hole 1.2: 1(0,0) 2(2.54,0) 3(5.08,0)
  silkscreen extent -1.27,-1.27 6.35,1.27, body extent -2.47,-2.33 7.41,3.42, height 7.88
"[Jumper] Solderable Jumper" [mil]
  round 1 smd: 1(-30.71,0) 2(30.71,0)
  Top Layer region: -8.9,-23.62 -8.9,23.62 -28.9,23.62 -28.9,23.62 -39.15,21.28 -47.37,14.73 -51.93,5.26 -51.93,-5.26 -47.37,-14.73 -39.15,-21.28 -28.9,-23.62 -28.9,-23.62
  Top Layer region: 8.9,-23.62 8.9,23.62 28.9,23.62 28.9,23.62 39.15,21.28 47.37,14.73 51.93,5.26 51.93,-5.26 47.37,-14.73 39.15,-21.28 28.9,-23.62 28.9,-23.62
  silkscreen extent -65,-35 65,35
"[LED] Thru-Hole, 3mm, Green" [mm]
  round 1.5 hole 0.9: 1(0,0)
  rect 1.5x1.5 hole 0.9: 2(2.54,0)
  silkscreen extent -1.27,-1.27 3.81,1.27, body extent -0.63,-1.92 2.95,1.92, height 5.6
"[LED] Thru-Hole, 3mm, Red" [mm]
  round 1.5 hole 0.9: 1(0,0)
  rect 1.5x1.5 hole 0.9: 2(2.54,0)
  silkscreen extent -1.27,-1.27 3.81,1.27, body extent -0.63,-1.92 2.95,1.92, height 5.6
"[LED] Thru-Hole, 3mm, White" [mm]
  round 1.5 hole 0.9: 1(0,0)
  rect 1.5x1.5 hole 0.9: 2(2.54,0)
  silkscreen extent -1.27,-1.27 3.81,1.27, body extent -0.63,-1.92 2.95,1.92, height 5.6
"[LED] Thru-Hole, 3mm, Yellow" [mm]
  round 1.5 hole 0.9: 1(0,0)
  rect 1.5x1.5 hole 0.9: 2(2.54,0)
  silkscreen extent -1.27,-1.27 3.81,1.27, body extent -0.63,-1.92 2.95,1.92, height 5.6
"[MCU] RP2350A" [mm]
  rrect25% 0.83x0.22 smd: 1(-3.44,2.8) 2(-3.44,2.4) 3(-3.44,2) 4(-3.44,1.6) 5(-3.44,1.2) 6(-3.44,0.8) 7(-3.44,0.4) 8(-3.44,0) 9(-3.44,-0.4) 10(-3.44,-0.8) 11(-3.44,-1.2) 12(-3.44,-1.6) 13(-3.44,-2) 14(-3.44,-2.4) 15(-3.44,-2.8) 31(3.44,-2.8) 32(3.44,-2.4) 33(3.44,-2) 34(3.44,-1.6) 35(3.44,-1.2) 36(3.44,-0.8) 37(3.44,-0.4) 38(3.44,0) 39(3.44,0.4) 40(3.44,0.8) 41(3.44,1.2) 42(3.44,1.6) 43(3.44,2) 44(3.44,2.4) 45(3.44,2.8)
  rrect25% 0.22x0.83 smd: 16(-2.8,-3.44) 17(-2.4,-3.44) 18(-2,-3.44) 19(-1.6,-3.44) 20(-1.2,-3.44) 21(-0.8,-3.44) 22(-0.4,-3.44) 23(0,-3.44) 24(0.4,-3.44) 25(0.8,-3.44) 26(1.2,-3.44) 27(1.6,-3.44) 28(2,-3.44) 29(2.4,-3.44) 30(2.8,-3.44) 46(2.8,3.44) 47(2.4,3.44) 48(2,3.44) 49(1.6,3.44) 50(1.2,3.44) 51(0.8,3.44) 52(0.4,3.44) 53(0,3.44) 54(-0.4,3.44) 55(-0.8,3.44) 56(-1.2,3.44) 57(-1.6,3.44) 58(-2,3.44) 59(-2.4,3.44) 60(-2.8,3.44)
  rect 5.5x5.5 smd paste-4: 61(0,0)
  silkscreen extent -4.57,-3.5 3.5,3.5, body extent -3.55,-3.55 3.55,3.55, height 0.96
"[Port] Shank Connector (100A)" [mm] "7461057, internal thread"
  round 2.3 hole 1.6: 1(-2.54,-2.54) 1(-2.54,0) 1(-2.54,2.54) 1(2.54,-2.54) 1(2.54,0) 1(2.54,2.54)
  body extent -3.5,-3.5 3.5,3.5, height 6
"[Port] USB Type-B Thru-Hole" [mm] "USB-B-S-F-B-TH"
  rect 1.408x1.408 hole 0.9: 1(1.25,7)
  round 1.408 hole 0.9: 2(-1.25,7) 3(-1.25,5) 4(1.25,5)
  round 3.316 hole 2.3: S1(-6.02,2.3) S2(6.02,2.3)
  silkscreen extent -6.05,-8.1 6.85,8.1, body extent -7.25,-8.1 7.25,8.4, height 10.7
"[PTC] 500mA Trip" [mm] "Part #: MF-MSMF050-2"
  rect 1.5x3.2 smd: 1(-2.1,0) 2(2.1,0)
  silkscreen extent -3.33,-1.6 1.1,1.73, body extent -2.27,-1.62 2.27,1.62, height 1.1
"[Res] SMD 0805" [mm]
  rect 1.04x1.47 smd: 1(-0.94,0) 2(0.94,0)
  silkscreen extent -0.1,-0.72 0.1,0.72, body extent -1,-0.63 1,0.63, height 0.5
"[Screw Terminal] 2pin" [mm]
  round 2 hole 1.3: 1(0,0) 2(5.08,0)
  silkscreen extent -2.54,-3.5 7.62,4.5, body extent -2.95,-3.5 7.55,4.1, height 9.99
"[Screw Terminal] 4pin" [mm]
  round 2 hole 1.3: 1(0,0) 2(5.08,0) 3(10.16,0) 4(15.24,0)
  silkscreen extent -2.54,-3.5 18.46,4.5, body extent -2.95,-3.5 17.75,4.1, height 9.99
"[Switch] Pushbutton" [mm] "(Regular pushbutton)"
  round 1.5 hole 1: 1(-3.25,2.25) 2(3.25,2.25) 3(-3.25,-2.25) 4(3.25,-2.25)
  silkscreen extent -4.6,-3 3,3, body extent -3.85,-3 3.85,3, height 4.95
"[XTAL] SMD 12MHz" [mm]
  rect 1.3x1.05 smd: 1(-1.15,-0.875) 2(1.15,-0.875) 3(1.15,0.875) 4(-1.15,0.875)
  silkscreen extent -1.2,-1.9 0.2,1.25, body extent -1.6,-1.25 1.6,1.25, height 0.75

## Part data
C1 C2 C3 C4 C5 C6 C7 C9 C12 C13 C14 C15 C19 C20 C23 C24 C27 C29: Capacitance=100nF, Size Package=0805
C8 C10 C11 C16: Capacitance=4.7uF, Size Package=0805
C17 C18: Capacitance=15pF, Size Package=0805
C21 C22: Capacitance=47uF, Size Package=0805
C25: library part "[Cap] SMD Polarized", Capacitance=100uF, Diameter=4mm
C26: library part "[Cap] Thru-Hole Polarized", Capacitance=1000uF, Pin Spacing=5mm
C28: Capacitance=1uF, Size Package=0805
D1: library part "[LED] Thru-Hole 3mm", "3mm LED", Color=White
D2: library part "[LED] Thru-Hole 3mm", "3mm LED", Color=Green
D3: library part "[LED] Thru-Hole 3mm", "3mm LED", Color=Yellow
D4: library part "[LED] Thru-Hole 3mm", "3mm LED", Color=Red
D5: library part "[Diode] SMD Schottky", "PMEG6010ELR", Size Package=SOD-123W
D6: library part "[Diode] SMD Rectifier", "Generic", Size Package=M7
D7: library part "[Diode] Thru-Hole Schottky", Mouser Part #=511-1N5822
F1: library part "[PTC] 500mA Trip", "MF-MSMF050-2 / JLC Part #: C17313", JLC Part #=C17313, Size Package=1812, Trip Current=500mA
F2 F3: library part "[Fuse] Thru-Hole Blade", Capacity=20A
J1 J2 J3 J4: "Solderable jumper"
  J1 J2 J4: NO/NC=NO
  J3: NO/NC=NC
L1: library part "[Inductor] SMD Inductor", Inductance=2.2uH, Size Package=0603
L2: library part "[Inductor] SMD Inductor", Inductance=10uH, Size Package=0603
L3: library part "[Ferrite] SMD Ferrite Bead (1)", Res @ Freq="30 @ 100MHz", Size Package=0805
L4: library part "[Inductor] SMD Inductor", Inductance=100uH, Size Package=1210
O1: library part "[XTAL] SMD 12MHz", "815-ABM8-272-T3"
Q1: library part "[FET] P-Channel MOSFET", JLC Part #=C2959854
R1 R14 R15: Resistance=1k, Size Package=0805
R2 R3: Resistance=27, Size Package=0805
R4: Resistance=33, Size Package=0805
R5 R6 R7: Resistance=2k, Size Package=0805
R8 R9 R10 R20 R21: Resistance=100k, Size Package=0805
R11 R12: Resistance=10k, Size Package=0805
R13: Resistance=9.53k, Size Package=0805
R16 R17 R18 R19: Resistance=220, Size Package=0805
S1 S2: library part "[Switch] Pushbutton"
SEG1: Color=Red, Mouser Part #=474-COM-11405
T2: library part "[Screw Terminal] 4pin"
U2: library part "[IC] 16Mb Flash Memory", "W25Q128JVSIQ TR"
U3: library part "[IC] 3V3 Regulator (2)"
U4: library part "[IC] Dual Op-Amp", JLC Part #=C105242
U5: library part "[IC] Battery Voltage Monitor (36V)", "INA226AIDGST"
U6: library part "[IC] Hall Effect Current Sensor", "TMCS1100"
U7: library part "[DIP IC] 24pin"
U8: library part "[IC] Level Shifter"
U9: library part "[IC] Buck Converter"
X1: "USB-B-S-F-B-TH", JLC Part #=C5714571
X3 X4 X5 X6: library part "[Port] Shank Connector (100A)", "7461057, internal thread"
Z1 Z2: JLC Part #=C840634, Size Package=0603

## Free pads (board coordinates)
  round 6 hole 3.5: X(4.5,4.5) X(4.5,78) X(92.5,4.5) X(92.5,78)

## Via types
v1: diameter 0.55, hole 0.2, Top Layer to Bottom Layer, 240 vias
v2: diameter 0.55, hole 0.175, Top Layer to Bottom Layer, 101 vias

## Nets (pads, with @x,y where several pads share a name; then routed paths per layer and width w, separated by ;. In a path a pad name is that pad's centre, name@x,y a point inside that pad or via, vN(x,y) a via of type N, cw(c..) or ccw(c..) an arc to the next point about the centre after c; other vN are vias at no path point)
"3V3 En": R9.1 U3.6 | length 10.1
  Bottom Layer w0.203: U3.6@37.25,69 37.211,68.961 37.211,66.675 38.386,65.5 42.585,65.5 43.785,64.3 R9.1@44,64.3
+1V1: C3.2 C8.2 C13.2 C16.2 L2.1 U1.6 U1.23 U1.39 U1.50 | length 48.7
  +5/3.3 w0.2: v2@41.577,22.584 41.654,22.508 41.654,22.1 41.783,21.971 ; v2@41.606,31.496 41.606,30.943 36.576,25.913 v2(36.576,25.273) 36.576,24.214 38.819,21.971 41.783,21.971 ; v2(46.3,24.5) 46.3,22.597 45.674,21.971 41.783,21.971
  Bottom Layer w0.2: L2.1@33.19,19 33.19,19.035 34.01,19.855 34.01,22.881 34.129,23 C8.2@34.91,23 36.044,23 36.149,23.105 36.149,24.846 v2(36.576,25.273) 36.671,25.273 36.889,25.491 37.048,25.491 37.346,25.789 37.719,25.789 37.73,25.8 U1.50@38.56,25.8 ; U1.6@41.2,30.44 41.2,31.09 42.368,32.258 42.833,32.258 44.175,33.6 C3.2@44.5,33.6 ; v2(41.5,22.584) 42.365,21.719 42.365,21.695 42.46,21.6 43.05,21.6 C13.2@43.25,21.4 ; v2@41.577,22.584 41.592,22.599 41.592,23.552 U1.39@41.6,23.56 ; U1.23@45.44,27 46.533,27 46.863,26.67 46.863,23.202 C16.2@47.565,22.5 ; v2(46.3,24.5) 46.863,24.5
  other v2: 41.756,31.7
+3V3: C1.2 C2.2 C4.2 C5.2 C6.2 C7.2 C9.2 C10.2 C11.1 C12.2 C14.2 C15.2 C19.1 C22.2 C27.1 J1.1 R4.2 R5.2 R6.2 R7.2 R8.1 T1.1 U1.1 U1.11 U1.20 U1.30 U1.38 U1.44 U1.45 U1.49 U1.53 U1.54 U2.8 U3.1 U3.10 U4.6 U5.6 U8.5 | length 282.7
  Top Layer w0.25: v2(68.2,26.6) v2(68.2,29.1)
  +5/3.3 w0.25: 51.562,22.225 61.087,22.225 61.75,22.888 v2(61.75,23.7)
  +5/3.3 w0.254: v2(34.01,30) v2@34.01,30.068 ; v2@39.342,33.627 40.215,34.5 47.025,34.5 48.275,33.25 v2(48.514,33.25) 51.411,33.25 51.562,33.401 ; v2@46.491,28.491 46.732,28.25 51.562,28.25 ; 51.562,34.94 v2(54,34.94)
  +5/3.3 w0.3: v2(19.5,68.675) 19.5,64.015 19.515,64 ; 28.829,64.119 34.01,58.938 34.01,38.735 33.525,38.25 ; v2(29.5,38.25) 31.512,38.25 ; v2(33.11,13.75) 34.832,13.75 37.338,16.256 37.338,17.018 ; v2@34.01,30.068 31.512,32.565 31.512,38.25 ; v2(36.422,21.249) 37.338,20.333 ; 37.338,20.447 37.338,17.018 ; 37.375,20.447 v2@41.197,20.447 ; 51.562,33.401 51.562,28.25 51.562,22.225 51.562,18.288 50.292,17.018 37.338,17.018 ; 51.562,33.5 51.562,34.94 51.562,35.56 48.872,38.25 33.525,38.25 ; 31.512,38.25 33.525,38.25
  +5/3.3 w0.4: T1.1@4.5,64 19.515,64 28.71,64 28.829,64.119 28.829,71.755 29.574,72.5 v2(35.4,72.5) ; v2@41.197,20.447 v2(41.25,20.5)
  Bottom Layer w0.2: C7.2@34.91,29 34.91,28.675 36.585,27 U1.53@38.56,27 ; C6.2@34.91,31 35.049,30.861 35.555,30.861 35.687,30.729 35.687,29.083 37.37,27.4 U1.54@38.56,27.4 ; C11.1@39.2,21.45 U1.45@39.2,23.56 ; U1.1@39.2,30.44 39.2,32.342 39.898,33.04 41.793,33.04 C4.2@42.353,33.6 ; U1.44@39.6,23.56 39.6,22.725 C12.2@40.925,21.4 ; U1.38@42,23.56 42,22.897 42.91,21.987 44.338,21.987 C14.2@44.93,21.395 ; C19.1@63.119,23.85 63.444,23.85 63.935,23.359 R8.1@66,23.359 66.04,23.399 66.04,24.159 66.313,24.432 67.564,24.432 68,24.868 C27.1@68,25.459
  Bottom Layer w0.25: U5.6@61.25,25.55 61.25,25.048 61.275,25.023 61.604,25.023 61.75,24.877 v2(61.75,23.7) 61.831,23.7 61.981,23.85 C19.1@63.119,23.85 ; C27.1@68,25.459 68.025,25.459 68.2,25.634 v2(68.2,26.6) ; v2(68.2,29.1) U8.5@68.2,30.2
  Bottom Layer w0.254: v2(29.5,38.25) 29.5,39.03 J1.1@30.22,39.75 ; v2(34.01,30) 34.067,29.943 34.292,29.943 34.91,29.325 C7.2@34.91,29 ; 34.292,30.057 34.91,30.675 C6.2@34.91,31 ; C9.2@35.083,21.205 35.083,21.249 v2(36.422,21.249) 36.422,21.329 36.536,21.443 36.536,24.344 37.592,25.4 U1.49@38.56,25.4 ; C22.2@35.4,71 U3.10@37.25,71 ; U2.8@38.525,33.095 39.031,33.6 v2(39.37,33.6) C5.2@40.5,33.6 C4.2@42.207,33.6 ; C11.1@39.25,21.4 C12.2@40.925,21.4 ; C12.2@41.25,21.4 v2(41.25,20.5) 45.011,20.5 45.245,20.734 45.245,21.395 C14.2@44.93,21.395 ; C4.2@42.034,33.427 C4.2@42.207,33.6 ; C4.2@42.5,33.6 42.353,33.6 C4.2@42.207,33.6 ; U1.11@43.2,30.44 43.2,31.897 44.196,32.893 46.351,32.893 46.5,33.042 C2.2@46.5,33.6 46.825,33.6 46.998,33.427 46.998,33.399 47.147,33.25 v2(48.514,33.25) ; C14.2@45.25,21.4 45.256,21.406 46.609,21.406 ; U1.30@45.44,24.2 45.684,24.2 45.701,24.183 45.701,23.514 46.609,22.606 46.609,21.406 ; U1.20@45.44,28.2 46.2,28.2 v2@46.491,28.491 ; v2(46.5,28.4) 46.552,28.452 46.867,28.452 47.392,28.977 47.392,29.827 C1.2@47.565,30 ; C15.2@47.565,20.5 47.565,20.825 47.392,20.998 47.017,20.998 46.609,21.406 ; v2@54,34.992 R7.2@59.5,34.992
  Bottom Layer w0.3: U4.6@17.85,68.675 v2(19.5,68.675) ; U3.10@37.25,71 37.25,71.521 37.484,71.755 39.516,71.755 39.75,71.521 U3.1@39.75,71
  Bottom Layer w0.4: v2(33.11,13.75) C10.2@33.11,17 ; C22.2@35.4,71 v2(35.4,72.5) ; U2.8@38.05,33.095 U2.8@38.525,33.095